# Altium PCB Pet_Tracker_MB_Test.PcbDoc
Units mm, origin at the board's own origin, x right, y up, seen from the top; angles counter-clockwise.
Board outline 106 x 60 mm, 3 copper layers (Top Layer, Mid-Layer 2, Bottom Layer); 57 components, 61 nets, 233 pads, 67 vias.
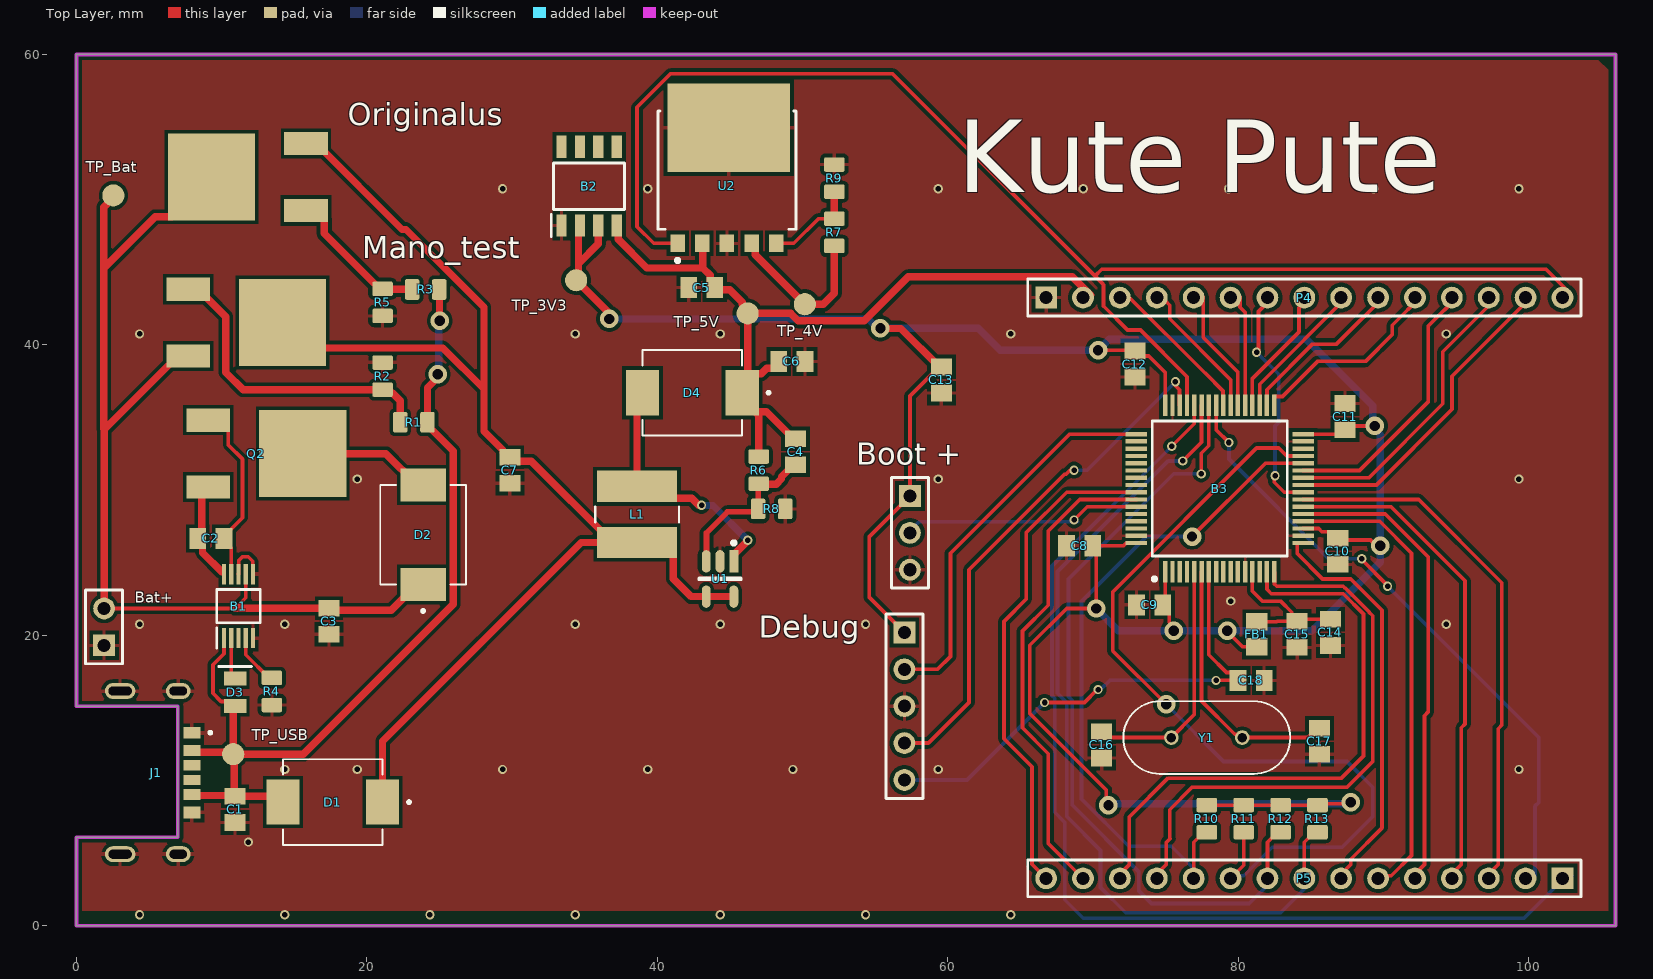
[diagram p0: Top Layer view]
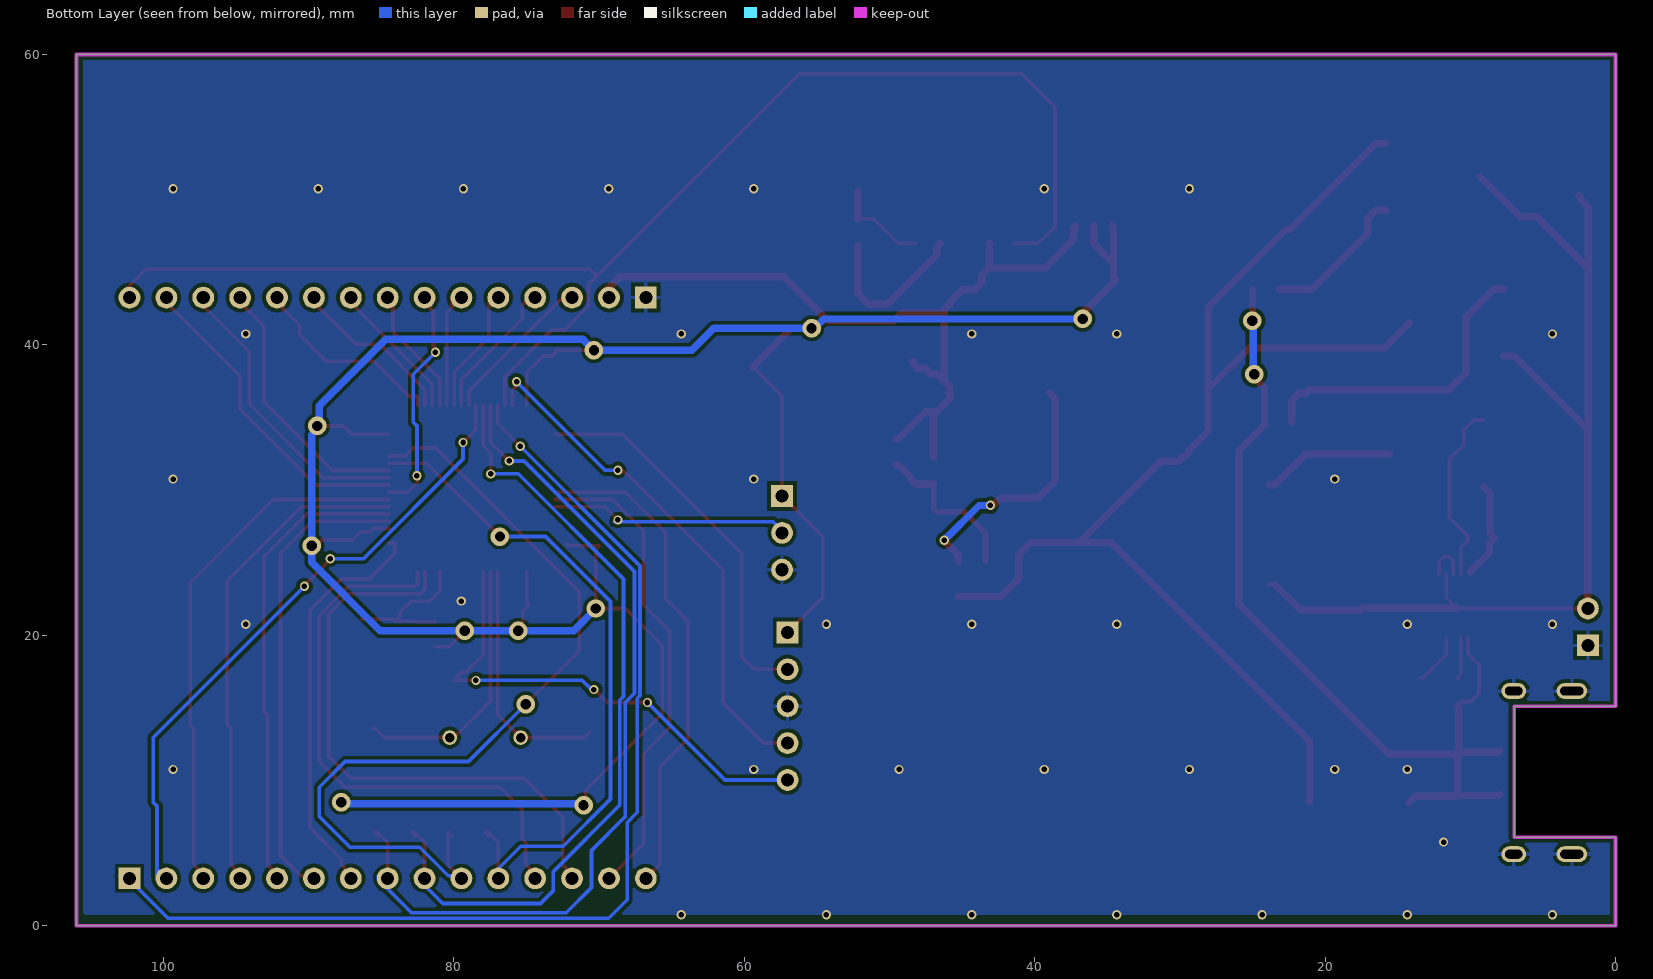
[diagram p1: Bottom Layer view, seen from below]

## Layer stack, top to bottom
Top Solder: solder mask 0.0102, Solder Resist, Dk 3.5
Top Layer: signal copper 0.0356
Dielectric 1: dielectric 0.32, FR-4, Dk 4.8
Mid-Layer 2: signal copper 0.0356
Dielectric2: dielectric 0.32, FR-4, Dk 4.8
Bottom Layer: signal copper 0.0356
Bottom Solder: solder mask 0.0102, Solder Resist, Dk 3.5

## Board outline
0,0 0,6.096 6.985,6.096 6.985,15.113 0,15.113 0,60 106,60 106,0

## Design rules (kind name [scope] priority, off if disabled: settings)
Clearance [All] p1: gap=0.254 ignorepadtopadclearanceinfootprint=FALSE except(0: Arc-Hole Track-Hole SMDPad-Hole THPad-Hole Via-Hole Fill-Hole Poly-Hole Region-Hole Text-Hole; 0.127: Arc-Arc Arc-Track Arc-SMDPad Arc-Text Track-Track Track-SMDPad Track-Text SMDPad-SMDPad SMDPad-Text THPad-Text Via-Text Fill-Text Poly-Text Region-Text Text-Text)
MinimumSolderMaskSliver [All] p1: minsoldermaskwidth=0.038
PolygonConnect VIA_COnnect [(InNamedUnion('Via Stitchings'))] p1: thpad.connectstyle=Relief thpad.reliefconductorwidth=0.254 thpad.reliefentries=4 thpad.polygonreliefangle="90 Angle" thpad.airgapwidth=0.254 smdpad.connectstyle=Relief smdpad.reliefconductorwidth=0.254 smdpad.reliefentries=4 smdpad.polygonreliefangle="90 Angle" smdpad.airgapwidth=0.254 via.connectstyle=Direct via.reliefconductorwidth=0.254 via.reliefentries=4 via.polygonreliefangle="90 Angle" via.airgapwidth=0.254
PolygonConnect PolygonConnect_1 [All] p2: connectstyle=Relief reliefconductorwidth=0.254 reliefentries=4 polygonreliefangle="90 Angle" airgapwidth=0.254
RoutingVias [All] p1: holewidth=0.711 width=1.27 viastyle="Through Hole" minholewidth=0.15 minwidth=0.25 maxholewidth=1 maxwidth=1.5
SilkToSolderMaskClearance [IsPad] p1: minsilkscreentomaskgap=0.127 clearancetoexposedcopper=TRUE
SolderMaskExpansion [All] p1: expansion=0.038 istentingtop=FALSE
Width [All] p1: maxlimit=1 minlimit=0.254 preferedwidth=0.254
28 further rules are at their usual default settings.

## Classes and differential pairs
component class STM: B3 "Boot +" C8 C9 C10 C11 C12 C13 C14 C15 C16 C17 C18 Debug FB1 P4 P5 R10 R11 R12 R13 Y1
component class Power_Schematic: B1 B2 Bat+ C1 C2 C3 C4 C5 C6 C7 D1 D2 D3 D4 L1 Mano_test Originalus Q2 R1 R2 R3 R4 R5 R6 R7 R8 R9 TP_3V3 TP_4V TP_5V TP_Bat TP_USB U1 U2
component class Blue_Pill_V2_Schematic: C19 C20 C21 C22 C23 C24 J2 L2 Q4 Q5 Q6 R14 R15 R16 R17 R18 R19 R20 U3

## Components (designator, comment, footprint, x,y, rotation, side; value= is the part's Value field where it differs from the comment)
B1 "MAX1898EUB42+" MAX1898EUB42 11.16,22.012 r90 top
B2 "MC33269D-3.3G" 3V3Voltage_MC33269D-3.3G 35.306,50.927 r90 top
B3 "STM32L433RCT6P" STM32L433RCT6P 78.74,30.099 r90 top
Bat+ "Battery 4.2V" HDR1X2 1.905,19.304 r90 top (schematic designator P1)
"Boot +" "Header 3" HDR1X3 57.404,29.591 r270 top (schematic designator P2)
C1 "10uF" CAP_0805 10.922,8.001 r90 top
C2 "100nF" CAP_0805 9.26,26.67 r180 top
C3 "SMT_CAP" CAP_0805 17.399,20.966 r90 top
C4 "4.7nF" CAP_0805 49.53,32.639 r90 top
C5 "330nF" CAP_0805 43.064,43.942 r0 top
C6 "10uF" CAP_0805 49.276,38.862 r180 top
C7 "10uF" CAP_0805 29.845,31.369 r90 top
C8 "100nF" CAP_0805 69.088,26.162 r0 top
C9 "100nF" CAP_0805 73.914,22.098 r0 top
C10 "100nF" CAP_0805 86.868,25.781 r90 top
C11 "100nF" CAP_0805 87.376,35.063 r270 top
C12 "100nF" CAP_0805 72.898,38.68 r90 top
C13 "1uF" CAP_0805 59.563,37.581 r90 top
C14 "1uF" CAP_0805 86.36,20.193 r90 top
C15 "10nF" CAP_0805 84.074,20.066 r90 top
C16 "27pF" CAP_0805 70.612,12.446 r270 top
C17 "27pF" CAP_0805 85.598,12.7 r90 top
C18 "100nF" CAP_0805 80.899,16.891 r180 top
D1 "SS32" POWER_SCHOTKY_3A 17.653,8.509 r180 top
D2 "SS32" POWER_SCHOTKY_3A 23.876,26.924 r90 top
D3 "Charge_LED" LED_0805 10.922,16.068 r270 top
D4 "SS32" POWER_SCHOTKY_3A 42.418,36.703 r180 top
Debug "Header 5" HDR1X5 57.023,20.193 r270 top (schematic designator P3)
FB1 "120R" FER_BEAD_0805 81.28,20.066 r90 top
J1 "POWER_USB_C" POWER_USB_C 3.008,10.541 r270 top
L1 "10uH" MCSD54-4R7MU 38.608,28.321 r270 top
Mano_test "MOSFET Pch -45V -4.5A" P_CHANNEL_POWER_RD3H045SPTL1 11.938,41.529 r270 top (schematic designator Q1)
Originalus "MOSFET Pch -45V -4.5A" P_CHANNEL_POWER_RD3H045SPTL1 11.557,51.562 r90 top (schematic designator Q3)
P4 "Header 15" HDR1X15 66.786,43.257 r0 top
P5 "Header 15" HDR1X15 102.346,3.257 r180 top
Q2 "MOSFET Pch -45V -4.5A" P_CHANNEL_POWER_RD3H045SPTL1 13.335,32.512 r270 top
R1 "0" RES_0805 23.241,34.671 r0 top
R2 "100k" RES_0805 21.082,37.846 r270 top
R3 "0" RES_0805 24.049,43.815 r0 top
R4 "750" RES_0805 13.462,16.129 r270 top
R5 "100k" RES_0805 21.082,42.926 r90 top
R6 "100k" RES_0805 46.99,31.369 r90 top
R7 "5.1k" RES_0805 52.197,47.752 r270 top
R8 "33k" RES_0805 47.879,28.702 r180 top
R9 "2.2k" RES_0805 52.197,51.481 r270 top
R10 "4K7" RES_0805 77.851,7.366 r90 top
R11 "4K7" RES_0805 80.391,7.366 r90 top
R12 "4K7" RES_0805 82.931,7.366 r90 top
R13 "4K7" RES_0805 85.471,7.366 r90 top
TP_3V3 "T_P_3V3" T_P 34.417,44.45 r90 top net-tie (schematic designator T_P3)
TP_4V "T_P_4V" T_P 50.165,42.799 r180 top net-tie (schematic designator T_P5)
TP_5V "T_P_5V" T_P 46.228,42.164 r180 top net-tie (schematic designator T_P4)
TP_Bat "T_P_BAT" T_P 2.54,50.292 r90 top net-tie (schematic designator T_P2)
TP_USB "T_P_USB" T_P 10.795,11.811 r90 top net-tie (schematic designator T_P1)
U1 "Switch Voltage Regulator MIC2250-1YD5-TR" Switching_MIC2250-1YD5-TR 44.323,23.876 r270 top
U2 "1.24V-5V MIC37252WR" 1V24_5V_MIC37252WR 44.802,51.775 r0 top
Y1 "16MHZ_TL" 16MHZ_TL 77.851,12.954 r180 top

## Footprints (in the part's own frame and the unit in brackets; to place one, negate y for a bottom-side part, rotate by r counter-clockwise, add the part's x,y. Pads: shape width x height; smd on the part's side, far side on the other; paste and mask are expansions set on the pad)
1V24_5V_MIC37252WR [mm]
  rect 1x1.2 smd paste-2539.97 mask+0: 1(-3.4,-4.785) 2(-1.7,-4.785) 3(0,-4.785) 4(1.7,-4.785) 5(3.4,-4.785)
  rect 8.45x6.096 smd paste-1000 mask+0: 6(0.127,3.175)
  silkscreen extent -4.76,-6.08 4.76,4.32, body extent -4.63,-5.09 4.63,4.96, height 1.78
3V3Voltage_MC33269D-3.3G [mm]
  rect 1.525x0.7 smd: 1(-2.712,1.905) 2(-2.712,0.635) 3(-2.712,-0.635) 4(-2.712,-1.905) 5(2.712,-1.905) 6(2.712,-0.635) 7(2.712,0.635) 8(2.712,1.905)
  silkscreen extent -3.47,-2.45 1.6,2.61, body extent -3,-2.45 3,2.45, height 1.75
16MHZ_TL [mm]
  round 1.007 hole 0.657: 1(-2.44,0) 2(2.44,0)
  silkscreen extent -5.75,-2.5 5.75,2.5, body extent -5.75,-2.5 5.75,2.5, height 3.25
CAP_0805 [mm]
  rect 1.15x1.45 smd: 1(-0.9,0) 2(0.9,0)
FER_BEAD_0805 [mm]
  rect 1.2x1.47 smd: 1(-0.86,0) 2(0.86,0)
  body extent -1,-0.63 1,0.63, height 1.05
HDR1X2 [mm] "Connector; Header; 2 Position"
  rect 1.5x1.5 hole 0.9: 1(0,0)
  round 1.5 hole 0.9: 2(2.54,0)
  silkscreen extent -1.27,-1.27 3.81,1.27
HDR1X3 [mm] "Connector; Header; 3 Position"
  rect 1.5x1.5 hole 0.9: 1(0,0)
  round 1.5 hole 0.9: 2(2.54,0) 3(5.08,0)
  silkscreen extent -1.27,-1.27 6.35,1.27
HDR1X5 [mm] "Connector; Header; 5 Position"
  rect 1.5x1.5 hole 0.9: 1(0,0)
  round 1.5 hole 0.9: 2(2.54,0) 3(5.08,0) 4(7.62,0) 5(10.16,0)
  silkscreen extent -1.27,-1.27 11.43,1.27
HDR1X15 [mm] "Connector; Header; 15 Position"
  rect 1.5x1.5 hole 0.9: 1(0,0)
  round 1.5 hole 0.9: 2(2.54,0) 3(5.08,0) 4(7.62,0) 5(10.16,0) 6(12.7,0) 7(15.24,0) 8(17.78,0) 9(20.32,0) 10(22.86,0) 11(25.4,0) 12(27.94,0) 13(30.48,0) 14(33.02,0) 15(35.56,0)
  silkscreen extent -1.27,-1.27 36.83,1.27
LED_0805 [mm]
  rect 0.95x1.55 smd: 1(-0.95,0) 2(0.95,0)
  silkscreen extent -1.78,-1.12 -1.78,1.12, body extent -1.02,-0.63 0.98,0.63, height 0.7
MAX1898EUB42 [mm]
  rect 1.4x0.3 smd: 1(-2.2,1) 2(-2.2,0.5) 3(-2.2,0) 4(-2.2,-0.5) 5(-2.2,-1) 6(2.2,-1) 7(2.2,-0.5) 8(2.2,0) 9(2.2,0.5) 10(2.2,1)
  silkscreen extent -2.9,-1.5 1.15,1.5, body extent -2.45,-1.5 2.45,1.5, height 1.1
MCSD54-4R7MU [mil]
  rect 85x217 smd paste+0 mask+0: 1(-76,0) 2(76,0)
  silkscreen extent -21,-114 21,114, body extent -94,-94 84,84, height 126
P_CHANNEL_POWER_RD3H045SPTL1 [mm]
  rect 1.6x3 smd: 1(-2.3,-4.25) 3(2.3,-4.25)
  rect 6x6 smd: 2(0,2.25)
  body extent -3.18,-5.39 3.43,5.61, height 2.31
POWER_SCHOTKY_3A [mm]
  rect 2.29x3.12 smd: A(3.43,0) C(-3.43,0)
  silkscreen extent -5.35,-2.95 3.43,2.95, body extent -4.1,-2.95 3.85,2.95, height 1.2
POWER_USB_C [mm]
  rect 0.7x1.2 smd: A5(-0.5,4.95) B5(0.5,4.95)
  rect 0.76x1.2 smd: A9(1.52,4.95) B9(-1.52,4.95)
  rect 0.8x1.2 smd: A12(2.75,4.95) B12(-2.75,4.95)
  oval 1.1x2.1 hole 0.6 slot 1.6 at 90 deg: S1(-5.62,0) S2(5.62,0)
  oval 1.1x1.7 hole 0.6 slot 1.2 at 90 deg: S3(-5.62,4) S4(5.62,4)
  silkscreen extent -2.85,6.11 -2.65,6.31, body extent -5.77,-2.4 5.77,5.1, height 1.56
RES_0805 [mm]
  rrect25% 1x1.42 smd: 1(-0.935,0) 2(0.935,0)
STM32L433RCT6P [mm]
  rect 1.475x0.3 smd: 1(-5.738,3.75) 2(-5.738,3.25) 3(-5.738,2.75) 4(-5.738,2.25) 5(-5.738,1.75) 6(-5.738,1.25) 7(-5.738,0.75) 8(-5.738,0.25) 9(-5.738,-0.25) 10(-5.738,-0.75) 11(-5.738,-1.25) 12(-5.738,-1.75) 13(-5.738,-2.25) 14(-5.738,-2.75) 15(-5.738,-3.25) 16(-5.738,-3.75) 33(5.738,-3.75) 34(5.738,-3.25) 35(5.738,-2.75) 36(5.738,-2.25) 37(5.738,-1.75) 38(5.738,-1.25) 39(5.738,-0.75) 40(5.738,-0.25) 41(5.738,0.25) 42(5.738,0.75) 43(5.738,1.25) 44(5.738,1.75) 45(5.738,2.25) 46(5.738,2.75) 47(5.738,3.25) 48(5.738,3.75)
  rect 0.3x1.475 smd: 17(-3.75,-5.738) 18(-3.25,-5.738) 19(-2.75,-5.738) 20(-2.25,-5.738) 21(-1.75,-5.738) 22(-1.25,-5.738) 23(-0.75,-5.738) 24(-0.25,-5.738) 25(0.25,-5.738) 26(0.75,-5.738) 27(1.25,-5.738) 28(1.75,-5.738) 29(2.25,-5.738) 30(2.75,-5.738) 31(3.25,-5.738) 32(3.75,-5.738) 49(3.75,5.738) 50(3.25,5.738) 51(2.75,5.738) 52(2.25,5.738) 53(1.75,5.738) 54(1.25,5.738) 55(0.75,5.738) 56(0.25,5.738) 57(-0.25,5.738) 58(-0.75,5.738) 59(-1.25,5.738) 60(-1.75,5.738) 61(-2.25,5.738) 62(-2.75,5.738) 63(-3.25,5.738) 64(-3.75,5.738)
  silkscreen extent -6.35,-4.65 4.65,4.65, body extent -6,-6 6,6, height 1.6
Switching_MIC2250-1YD5-TR [mm]
  rect 1.54x0.612 smd paste+0 mask+0: 1(-1.216,0.95)
  rrect100% 1.54x0.612 smd paste+0 mask+0: 2(-1.216,0) 3(-1.216,-0.95) 4(1.216,-0.95) 5(1.216,0.95)
  silkscreen extent -2.61,-1.45 0.05,1.45, body extent -1.4,-1.45 1.4,1.45, height 1
T_P [mil]
  round 60 smd: 1(0,0)

## Part data
B1: "Part: MAX1898EUB42+ BATT CHARGER, LI-ION, 4.2V", Manufacturer_Name="Analog Devices", Mouser Part Number=700-MAX1898EUB42, Arrow Part Number=MAX1898EUB42+, Arrow Price/Stock=https://www.arrow.com/en/products/max1898eub42/maxim-integrated?region=nac, Datasheet Link=https://datasheets.maximintegrated.com/en/ds/MAX1898.pdf, Geometry.Height=1.1mm, Manufacturer_Part_Number=MAX1898EUB42+, Mouser Price/Stock=https://www.mouser.co.uk/ProductDetail/Maxim-Integrated/MAX1898EUB42%2b?qs=LHmEVA8xxfaFlPLqK8C6rw%3D%3D
B2: library part LDO3V3, "Voltage regulator,Part: MC33269D-3.3G, Low Dropout Voltage Regulator, 0.8A 3.3", Manufacturer_Name=onsemi, Mouser Part Number=863-MC33269D-3.3G, Arrow Part Number=MC33269D-3.3G, Arrow Price/Stock=https://www.arrow.com/en/products/mc33269d-3.3g/on-semiconductor?region=europe, Datasheet Link=http://www.onsemi.com/pub/Collateral/MC33269-D.PDF, Geometry.Height=1.75mm, Manufacturer_Part_Number=MC33269D-3.3G, Mouser Price/Stock=https://www.mouser.co.uk/ProductDetail/onsemi/MC33269D-33G?qs=dFKnUM%2FquJZ%252BBcrN2hd5Yg%3D%3D
B3: "ARM Cortex-M4 MCU 80 MHz with 256 Kbyte", Manufacturer_Name=STMicroelectronics, Mouser Part Number=511-STM32L433RCT6P, Arrow Part Number=STM32L433RCT6P, Arrow Price/Stock=https://www.arrow.com/en/products/stm32l433rct6p/stmicroelectronics?region=nac, Datasheet Link=https://www.mouser.com/datasheet/2/389/stm32l433cc-956250.pdf, Geometry.Height=1.6mm, Manufacturer_Part_Number=STM32L433RCT6P, Mouser Price/Stock=https://www.mouser.co.uk/ProductDetail/STMicroelectronics/STM32L433RCT6P?qs=5aG0NVq1C4w37CrDvhaloQ%3D%3D
Bat+: library part "Header 2", "Header, 2-Pin", LatestRevisionDate=17-Jul-2002, LatestRevisionNote="Re-released for DXP Platform.", Publisher="Altium Limited"
"Boot +": "Header, 3-Pin", LatestRevisionDate=17-Jul-2002, LatestRevisionNote="Re-released for DXP Platform.", Publisher="Altium Limited"
C1 C2 C4 C5 C6 C7 C8 C9 C10 C11 C12 C13 C14 C15 C16 C17 C18: library part SMT_CAP, Package=None, Availability=Unavailable, MP=LD051A270KAB2A, Price=None
C3: Package=None, Availability=Unavailable, MP=LD051A270KAB2A, Price=None
D1 D2 D4: library part POWER_SCHOTKY_3A, "Part: SS32", Package="SMC-2 ON Semiconductor", Availability="In Stock", Check_prices=https://www.snapeda.com/parts/SS32/Onsemi/view-part/?ref=eda, MF="ON Semiconductor", MP=SS32, Price=None, Purchase-URL=https://pricing.snapeda.com/search/part/SS32/?ref=eda, SnapEDA_Link=https://www.snapeda.com/parts/SS32/Onsemi/view-part/?ref=snap
D3: library part LED, "Part: HSMH-C170", Manufacturer_Name="Avago Technologies", Manufacturer_Part_Number=HSMH-C170, Mouser Part Number=630-HSMH-C170, Datasheet Link=https://docs.broadcom.com/docs/AV02-0551EN, Geometry.Height=0.9mm, Mouser Price/Stock=https://www.mouser.co.uk/ProductDetail/Broadcom-Avago/HSMH-C170?qs=YDL0qNrpDT6b21G9HrN9ig%3D%3D
Debug: "Header, 5-Pin", LatestRevisionDate=17-Jul-2002, LatestRevisionNote="Re-released for DXP Platform.", Publisher="Altium Limited"
FB1: library part SMT_FER_BEAD, "1 kOhms @ 100MHz 1 1.5A 150mOhm", Package="0805 TDK", Availability=Good, Check_prices=https://www.snapeda.com/parts/MPZ2012S102ATD25/TDK/view-part/2724083/?ref=eda, MF=TDK, MP=MPZ2012S102ATD25, Price=None, Purchase-URL=https://pricing.snapeda.com/search/part/MPZ2012S102ATD25/?ref=eda, SnapEDA_Link=https://www.snapeda.com/parts/MPZ2012S102ATD25/TDK/view-part/2724083/?ref=snap
J1: "Type C USB Charging Connector part name : USB4515-GF-A_REVA", Package=None, Check_prices=https://www.snapeda.com/parts/USB4515-GF-A/Global+Connector+Technology/view-part/?ref=eda, Digi-Key_Part_Number=2073-USB4515-GF-ATR-ND, MF="Global Connector Technology", MP=USB4515-GF-A, SnapEDA_Link=https://www.snapeda.com/parts/USB4515-GF-A/Global+Connector+Technology/view-part/?ref=snap
L1: library part IND, "Part: MCSD54-4R7MU", Manufacturer_Part_Number=MCSD54-4R7MU, Mfr_Name=Multicomp, Copyright="Copyright (C) 2023 Ultra Librarian. All rights reserved."
Mano_test Originalus Q2: library part "P_CHANNEL_POWER 4.5A RD3H045SPTL1", "Part: RD3H045SPTL1", Manufacturer_Name="ROHM Semiconductor", Manufacturer_Part_Number=RD3H045SPTL1, Package=RD3P175SNFRATL, DeviceSetName=RD3H045SPTL1, GateName_1=G$1, Height=mm, LibraryName=RD3H045SPTL1, Mouser_Part_Number=755-RD3H045SPTL1, Mouser_Price-Stock=https://www.mouser.co.uk/ProductDetail/ROHM-Semiconductor/RD3H045SPTL1?qs=W0yvOO0ixfGBWnxPdnIMog%3D%3D, SymbolName_1=RD3H045SPTL1
P4 P5: "Header, 15-Pin", LatestRevisionDate=17-Jul-2002, LatestRevisionNote="Re-released for DXP Platform.", Publisher="Altium Limited"
R1 R2 R3 R4 R5 R6 R7 R8 R9 R10 R11 R12 R13: library part SMT_RES, Package=0805, Power_Rating=".25 W", Resistance=.33, Tolerance=1%, Availability="In Stock", Check_prices=https://www.snapeda.com/parts/2-2176053-0/TE+Connectivity/view-part/?ref=eda, EU_RoHS_Compliance="Compliant with Exemptions", MF="TE Connectivity", MP=2-2176053-0, Price=None, SnapEDA_Link=https://www.snapeda.com/parts/2-2176053-0/TE+Connectivity/view-part/?ref=snap
TP_3V3 TP_4V TP_5V TP_Bat TP_USB: library part T_P, "Test_point"
U1: "Part: MIC2250-1YD5-TR / 2.5V to 5.5 V input  / 1.24V to 32V output"
U2: "Part: MIC37252WR"
Y1: "16MHz Â±30ppm Crystal 18pF 40 Ohms HC-49/US", Package="HC-49/US ABRACON", Availability="In Stock", Check_prices=https://www.snapeda.com/parts/ABL-16.000MHz-B4Y/Abracon+LLC/view-part/?ref=eda, MF="Abracon LLC", MP=ABL-16.000MHz-B4Y, Price=None, Purchase-URL=https://pricing.snapeda.com/search/part/ABL-16.000MHz-B4Y/?ref=eda, SnapEDA_Link=https://www.snapeda.com/parts/ABL-16.000MHz-B4Y/Abracon+LLC/view-part/?ref=snap

## Via types
v1: diameter 0.635, hole 0.381, Top Layer to Bottom Layer, tented both sides, 51 vias
v2: diameter 1.27, hole 0.711, Top Layer to Bottom Layer, tented both sides, 14 vias
v3: diameter 0.635, hole 0.381, Top Layer to Bottom Layer, 2 vias

## Nets (pads, with @x,y where several pads share a name; then routed paths per layer and width w, separated by ;. In a path a pad name is that pad's centre, name@x,y a point inside that pad or via, vN(x,y) a via of type N, cw(c..) or ccw(c..) an arc to the next point about the centre after c; other vN are vias at no path point)
3V3: "Boot +.1" B2.2 B2.3 B3.1 B3.19 B3.32 B3.48 B3.64 C8.2 C9.2 C10.2 C11.2 C12.2 C13.2 Debug.1 FB1.1 R10.2 R11.2 R12.2 R13.2 TP_3V3.1 | length 201.9
  Top Layer w0.254: Debug.1 54.61,22.606 54.61,26.797 57.404,29.591 57.404,36.472 59.413,38.481 C13.2 ; v2(70.358,39.624) C12.2@73.004,39.624 ; v2(71.074,8.301) 70.927,8.448 70.927,9.337 65.659,14.605 65.659,19.304 68.199,21.844 v2(70.231,21.844) 70.231,25.919 C8.2 72.107,26.162 72.263,26.318 ; C12.2 73.243,39.235 73.855,39.235 74.99,38.1 B3.48 ; B3.1 74.99,22.274 C9.2 75.262,21.65 75.262,20.898 ; R10.2 R11.2 R12.2 R13.2 85.575,8.405 87.653,8.405 v2(87.757,8.509) ; v2(79.248,20.32) 79.248,20.271 80.313,19.206 FB1.1 ; B3.19 85.554,27.349 85.774,27.129 86.42,27.129 C10.2 86.995,26.554 89.122,26.554 89.514,26.162 v2(89.789,26.162) ; B3.32 87.062,33.849 C11.2 87.63,34.417 v2(89.408,34.417)
  Top Layer w0.508: B2.2 34.575,48.119 34.575,45.593 ; B2.3 35.941,46.959 34.575,45.593 ; v2@36.557,42.31 TP_3V3.1 34.575,44.608 34.575,45.593 ; v2(55.372,41.148) 55.395,41.125 56.769,41.125 C13.2@59.413,38.481
  Bottom Layer w0.508: v2(36.703,41.783) 54.531,41.783 55.166,41.148 v2(55.372,41.148) 62.103,41.148 63.627,39.624 v2(70.358,39.624) 71.12,40.386 84.709,40.386 89.281,35.814 89.281,34.544 v2(89.408,34.417) ; v2(70.231,21.844) 71.755,20.32 v2(79.248,20.32) 85.078,20.32 ; v2(71.074,8.301) 71.178,8.405 87.653,8.405 v2(87.757,8.509) ; 85.09,20.32 89.789,25.019 89.789,33.83
  other v2: 75.565,20.32
3V3A: B3.13 C14.2 C15.2 FB1.2 | length 10.6
  Top Layer w0.254: B3.13 80.99,23.023 81.661,22.352 82.931,22.352 83.693,21.59 83.693,21.347 C15.2 ; FB1.2 82.662,20.926 82.702,20.966 C15.2 ; C14.2 84.201,21.093 C15.2
4V: R7.2 TP_4V.1 U2.4 | length 11.3
  Top Layer w0.508: U2.4 46.748,46.744 46.748,46.216 TP_4V.1 51.435,42.799 52.197,43.561 R7.2
5V: B2.4 C4.2 C5.2 C6.2 D4.C P4.2 R6.2 TP_5V.1 U2.2 | length 56.7
  Top Layer w0.508: B2.4 37.307,48.119 37.307,47.275 39.287,45.295 43.131,45.295 ; U2.2 43.131,46.961 43.131,45.295 ; R6.2 46.99,35.146 D4.C@46.739,35.397 ; C6.2 48.376,38.712 48.055,38.391 47.536,38.391 47.154,38.009 46.739,38.009 D4.C@46.228,37.498 ; C4.2 49.38,33.539 47.522,35.397 46.99,35.397 D4.C@46.739,35.397 ; P4.2@69.85,43.434 68.592,44.692 57.3,44.692 54.264,41.656 49.692,41.656 49.184,42.164 TP_5V.1 ; 43.131,45.295 43.643,44.783 43.643,44.263 44.117,43.789 45.003,43.789 45.858,42.934 45.858,42.808 46.228,42.439 TP_5V.1 ; D4.C@46.228,37.498 TP_5V.1 ; D4.C@46.228,37.498 45.848,37.118 D4.C 45.848,36.288 D4.C@46.739,35.397
5V_UNREGULATED: C7.2 D1.C L1.2 Mano_test.2 Originalus.3 U1.4 U1.5 | length 89.9
  Top Layer w0.5: Mano_test.2 15.928,39.789 25.235,39.789 28.067,36.957 ; Originalus.3 16.507,53.862 22.417,47.952 22.703,47.952 28.067,42.587 28.067,36.957 ; D1.C 21.083,12.701 34.773,26.391 L1.2@36.932,26.391 ; U1.5 U1.4 42.338,22.66 41.11,23.889 41.11,25.565 40.284,26.391 L1.2 L1.2@36.932,26.391 ; 28.067,36.957 28.067,34.047 29.374,32.74 29.374,32.59 29.695,32.269 C7.2 30.124,31.99 31.332,31.99 L1.2@36.932,26.391
5V_USB_CHRG: B1.1 C1.2 D1.A D3.2 J1.A9 J1.B9 R1.2 R3.2 TP_USB.1 | length 63.9
  Top Layer w0.254: B1.1 10.16,18.731 9.398,17.969 9.398,16.002 9.962,15.438 10.602,15.438 D3.2 ; C1.2@10.846,8.977 C1.2@10.858,8.965
  Top Layer w0.508: J1.A9 8.018,8.961 10.83,8.961 C1.2@10.846,8.977 ; J1.B9 8.083,11.936 10.67,11.936 TP_USB.1 ; D3.2 10.795,14.991 TP_USB.1 ; D1.A 13.831,8.901 C1.2 10.858,8.965 10.858,11.747 TP_USB.1 ; v2(24.892,37.973) 24.892,37.767 24.176,37.051 R1.2 24.176,34.461 25.944,32.693 25.944,22.139 15.616,11.811 TP_USB.1 ; R3.2 25.001,43.797 25.001,41.674 v2(25.019,41.656)
  Bottom Layer w0.508: v2(24.892,37.973) 24.956,38.036 24.956,41.593 v2(25.019,41.656)
GND: "Boot +.3" B1.5 B1.6 B1.8 B2.1 B3.12 B3.18 B3.31 B3.47 B3.63 Bat+.1 C1.1 C3.1 C5.1 C6.1 C7.1 C8.1 C9.1 C10.1 C11.1 C12.1 C13.1 C14.1 C15.1 C16.2 C17.1 C18.1 Debug.3 J1.A12 J1.B12 J1.S1 J1.S2 J1.S3 J1.S4 P4.1 R2.1 R4.2 R5.1 R8.1 R9.1 U1.2 U2.3 U2.6 | length 3
  Top Layer w0.254: B1.8 11.183,24.235 11.183,25.153 11.43,25.4 11.83,25.4 12.137,25.093 12.137,24.235 B1.6
  other v1: 4.346,0.757 14.346,0.757 24.346,0.757 34.346,0.757 44.346,0.757 54.346,0.757 64.346,0.757 11.846,5.757 14.346,10.757 19.346,10.757 29.346,10.757 39.346,10.757 49.346,10.757 59.346,10.757 99.346,10.757 4.346,20.757 14.346,20.757 34.346,20.757 44.346,20.757 54.346,20.757 94.346,20.757 79.502,22.352 19.346,30.757 59.346,30.757 99.346,30.757 4.346,40.757 34.346,40.757 44.346,40.757 64.346,40.757 94.346,40.757 29.346,50.757 39.346,50.757 59.346,50.757 69.346,50.757 79.346,50.757 89.346,50.757 99.346,50.757
I2C1SCL: B3.28 P5.11 R10.1 | length 47.5
  Top Layer w0.254: v2(76.835,26.797) 81.887,31.849 B3.28 ; P5.11 76.946,5.736 77.641,6.431 R10.1 R10.1@77.597,6.177
  Bottom Layer w0.254: v2(76.835,26.797) 73.691,26.797 69.215,22.321 69.215,8.723 72.477,5.461 75.393,5.461 P5.11@77.597,3.257
I2C1SDA: B3.29 P5.10 R11.1 | length 60.1
  Top Layer w0.254: v2(75.057,15.24) 71.374,18.923 71.374,22.987 81.28,32.893 82.804,32.893 83.348,32.349 B3.29 ; P5.10 80.391,4.162 R11.1 R11.1@80.137,6.177
  Bottom Layer w0.254: v2(75.057,15.24) 78.994,11.303 87.503,11.303 89.281,9.525 89.281,7.515 87.167,5.401 82.363,5.401 80.391,3.429 P5.10@80.137,3.429
I2C2SCL: B3.42 P5.9 R12.1 | length 55.3
  Top Layer w0.254: v1(77.47,31.115) 77.47,32.533 77.99,33.053 B3.42 ; P5.9 82.026,5.736 82.721,6.431 R12.1 R12.1@82.677,6.177
  Bottom Layer w0.254: v1(77.47,31.115) 75.565,31.115 68.326,23.876 68.326,15.781 68.58,15.527 68.58,8.307 73.152,3.735 73.152,2.413 74.041,1.524 80.772,1.524 82.265,3.017 P5.9@82.677,3.429
I2C2SDA: B3.43 P5.8 R13.1 | length 59.8
  Top Layer w0.254: v1(76.2,32.004) 77.49,33.294 B3.43 ; P5.8 84.566,5.736 85.261,6.431 R13.1 R13.1@85.217,6.177
  Bottom Layer w0.254: v1(76.2,32.004) 75.184,32.004 67.564,24.384 67.564,16.005 68.199,15.37 68.199,7.515 70.531,5.183 70.531,2.621 72.263,0.889 82.931,0.889 85.217,3.175 P5.8@85.217,3.429
NetB1_2: B1.2 D3.1 | length 2.9
  Top Layer w0.254: B1.2 10.66,17.28 D3.1
NetB1_4: B1.4 R4.1 | length 3.6
  Top Layer w0.254: B1.4 11.66,18.656 13.252,17.064 R4.1
NetB1_9: B1.9 C2.1 Q2.1 | length 12.7
  Top Layer w0.254: Q2.1 9.785,34.812 10.458,34.139 10.458,33.103 11.43,32.131 11.43,28.09 10.16,26.82 C2.1 10.16,26.52 10.66,26.02 B1.9
NetB1_10: B1.10 C2.2 Q2.3 | length 6.8
  Top Layer w0.508: Q2.3 8.637,29.763 8.637,26.947 C2.2 8.681,26.349 8.681,25.691 B1.10@10.011,24.362
NetB3_5: B3.5 C16.1 Y1.2 | length 17
  Top Layer w0.254: C16.1 71.004,12.954 Y1.2 76.99,14.533 B3.5
NetB3_6: B3.6 C17.2 Y1.1 | length 18.3
  Top Layer w0.254: B3.6 77.49,15.474 79.779,13.185 79.856,13.185 80.087,12.954 Y1.1 84.802,12.954 85.448,13.6 C17.2
NetB3_59: "Boot +.2" B3.59 | length 16.7
  Top Layer w0.254: v1@68.654,27.887 69.616,28.849 B3.59
  Bottom Layer w0.254: 57.404,27.051 57.404,27.186 58.031,27.813 v1@68.961,27.813
  other v1: 68.707,27.94
NetB4_2: 
NetB4_4: 
NetB4_9: 
NetB4_10: 
NetC4_1: C4.1 R6.1 R8.2 U1.3 | length 11.1
  Top Layer w0.381: U1.3 43.393,25.111 43.393,27.054 44.831,28.492 46.734,28.492 46.967,28.725 R6.1@46.967,30.411
  Top Layer w0.508: R6.1@46.967,30.411 48.202,30.411 48.561,30.77 48.561,30.92 49.38,31.739 C4.1
NetC22_1: 
NetD2_A: D2.A Q2.2 | length 9.2
  Top Layer w0.508: Q2.2 21.303,32.512 23.461,30.354 D2.A
NetD4_A: D4.A L1.1 U1.1 | length 17.4
  Top Layer w0.508: D4.A 38.608,36.323 38.608,30.607 39.789,29.426 42.377,29.426 42.847,28.956 v3(43.053,28.956) ; U1.1 45.273,25.555 46.228,26.51 v3(46.228,26.543)
  Bottom Layer w0.508: v3(43.053,28.956) 43.077,28.932 43.839,28.932 v3(46.228,26.543)
NetD6_A: 
NetD8_A: 
NetQ1_1: Mano_test.1 R1.1 R2.2 | length 21.5
  Top Layer w0.508: Mano_test.1 8.388,43.829 10.287,41.93 10.287,38.1 11.476,36.911 R2.2 21.328,36.665 21.784,36.665 22.306,36.143 R1.1
NetQ3_1: Originalus.1 R3.1 R5.2 | length 10.2
  Top Layer w0.508: Originalus.1 16.507,49.262 17.053,48.716 17.053,47.68 20.872,43.861 R5.2 21.105,43.838 23.091,43.838 R3.1
NetQ5_1: 
NetQ6_1: 
NetR7_1: R7.1 R9.2 U2.5 | length 6.6
  Top Layer w0.254: U2.5 49.403,46.99 51.1,48.687 R7.1
  Top Layer w0.508: R7.1 R9.2
NRESET: B3.7 C18.2 Debug.5 | length 34.2
  Top Layer w0.254: v1(66.675,15.367) 69.421,15.367 70.31,16.256 v1(70.358,16.256) ; B3.7 77.99,18.657 79.212,17.435 79.551,17.435 79.756,17.23 C18.2@79.756,16.891 ; v1(78.486,16.891) C18.2@79.756,16.891 ; C18.2 C18.2@79.756,16.891
  Bottom Layer w0.254: Debug.5 61.341,10.033 v1(66.675,15.367) ; v1(70.358,16.256) 70.525,16.256 71.16,16.891 v1(78.486,16.891)
PA3: B3.17 P5.7 | length 28.2
  Top Layer w0.254: B3.17 84.097,26.349 84.074,26.326 84.074,25.623 85.821,23.876 87.757,23.876 89.916,21.717 89.916,6.731 87.757,4.572 87.757,4.205 87.106,3.554 P5.7
PA4: B3.20 P5.6 | length 31.4
  Top Layer w0.254: B3.20 89.753,27.849 91.948,25.654 91.948,4.826 90.551,3.429 P5.6@90.297,3.429
PA5: B3.21 P5.5 | length 32.4
  Top Layer w0.254: B3.21 90.142,28.349 93.091,25.4 93.091,14.71 92.837,14.456 92.837,4.205 92.186,3.554 P5.5
PA6: B3.22 P5.4 | length 34.1
  Top Layer w0.254: B3.22 90.531,28.849 95.631,23.749 95.631,13.885 95.377,13.631 95.377,4.205 94.726,3.554 P5.4
PA7: B3.23 P5.3 | length 36.8
  Top Layer w0.254: B3.23 92.444,29.349 98.171,23.622 98.171,13.821 97.917,13.567 97.917,4.205 97.266,3.554 P5.3
PA8: B3.41 P5.2 | length 43.1
  Top Layer w0.254: B3.41 78.49,34.159 v1(79.375,33.274) ; v1(88.519,25.273) 88.519,25.209 90.297,23.431 v1(90.297,23.368)
  Bottom Layer w0.254: v1(79.375,33.274) 79.375,32.131 86.233,25.273 v1(88.519,25.273) ; v1(90.297,23.368) 100.711,12.954 100.711,8.487 100.457,8.233 P5.2@100.457,3.429
PA11: B3.44 P5.1 | length 75.2
  Top Layer w0.254: v1(75.438,33.02) 76.99,34.572 B3.44
  Bottom Layer w0.254: v1(75.438,33.02) 67.183,24.765 67.183,15.847 67.373,15.656 67.373,7.801 68.072,7.103 68.072,1.778 69.342,0.508 99.695,0.508 102.015,2.828 102.396,2.828 P5.1@102.997,3.429
PA12: B3.45 P4.15 U2.1 | length 95.7
  Top Layer w0.254: U2.1 39.751,46.99 38.608,48.133 38.608,56.366 40.916,58.674 56.209,58.674 70.142,44.742 ; B3.45 76.49,37.81 73.279,41.021 72.39,41.021 70.813,42.598 70.739,42.672 70.739,43.162 cw(c71.866,43.257) 70.739,43.352 70.739,44.144 70.665,44.219 70.142,44.742 ; P4.15@102.87,43.257 102.87,43.561 101.219,45.212 70.612,45.212 70.142,44.742
PB0: B3.25 P4.14 | length 22.6
  Top Layer w0.254: B3.25 89.531,30.349 94.742,35.56 94.742,37.846 P4.14@100.33,43.434
PB1: B3.26 P4.13 | length 20.8
  Top Layer w0.254: B3.26 89.015,30.849 94.107,35.941 94.107,39.53 97.79,43.213 P4.13@97.79,43.434
PB2: B3.27 P4.12 | length 18.8
  Top Layer w0.254: B3.27 88.372,31.349 93.091,36.068 93.091,41.275 P4.12@95.25,43.434
PB12: B3.33 P4.11 | length 14.1
  Top Layer w0.254: B3.33 82.49,36.425 82.513,36.448 83.057,36.448 85.471,38.862 88.773,38.862 90.622,40.711 90.622,41.346 P4.11@92.71,43.434
PB13: B3.34 P4.10 | length 12
  Top Layer w0.254: B3.34 81.99,36.905 85.135,40.05 86.786,40.05 P4.10@90.17,43.434
PB14: B3.35 P4.9 | length 10.1
  Top Layer w0.254: B3.35 81.49,37.294 P4.9@87.63,43.434
PB15: B3.36 P4.8 | length 9.3
  Top Layer w0.254: B3.36 80.99,37.683 84.201,40.894 84.201,42.545 P4.8@85.09,43.434
PC4: B3.24 P4.7 | length 16.4
  Top Layer w0.254: v1@81.407,39.497 81.407,42.291 P4.7@82.55,43.434 ; v1(82.55,30.988) 82.487,30.925 82.487,30.543 83.181,29.849 B3.24
  Bottom Layer w0.254: v1(81.28,39.497) 82.804,37.973 82.804,34.659 82.55,34.405 v1(82.55,30.988)
PC6: B3.37 P4.6 | length 7.8
  Top Layer w0.254: P4.6@80.01,43.434 80.137,43.307 80.137,42.589 80.49,42.236 B3.37
PC7: B3.38 P4.5 | length 8.6
  Top Layer w0.254: P4.5@77.47,43.434 77.597,43.307 77.597,40.513 79.99,38.12 B3.38
PC8: B3.39 P4.4 | length 9.5
  Top Layer w0.254: P4.4@74.93,43.434 74.93,43.097 75.295,42.731 75.295,41.799 79.49,37.604 B3.39
PC9: B3.40 P4.3 | length 10.3
  Top Layer w0.254: P4.3@72.39,43.39 77.744,38.036 77.759,38.036 78.967,36.829 78.967,35.86 B3.40
SWCLK: B3.49 Debug.2 | length 26.9
  Top Layer w0.254: Debug.2 59.309,17.653 60.198,18.542 60.198,25.654 68.393,33.849 B3.49
SWDIO: B3.46 Debug.4 | length 36.1
  Top Layer w0.254: Debug.4 58.674,12.573 61.468,15.367 61.468,24.511 68.052,31.095 68.158,31.095 68.432,31.369 v1(68.707,31.369) ; v1(75.692,37.465) 75.692,37.19 75.967,36.915 75.967,35.86 B3.46
  Bottom Layer w0.254: v1(68.707,31.369) 69.596,31.369 v1(75.692,37.465)
UART1RX: B3.58 P5.14 | length 33.7
  Top Layer w0.254: P5.14@69.554,3.029 66.929,5.654 66.929,11.843 65.151,13.621 65.151,20.288 66.929,22.066 66.929,27.178 69.1,29.349 B3.58
UART1TX: B3.57 P5.15 | length 34.7
  Top Layer w0.254: P5.15@67.016,3.027 65.808,4.235 65.808,10.943 63.881,12.87 63.881,20.955 65.405,22.479 65.405,27.051 68.203,29.849 B3.57
UART2RX: B3.16 P5.12 | length 39.1
  Top Layer w0.254: P5.12 74.406,3.554 75.057,4.205 75.057,5.727 75.311,5.981 75.289,6.003 75.289,7.979 76.835,9.525 87.503,9.525 89.281,11.303 89.281,21.336 89.027,21.59 89.027,21.621 87.407,23.241 87.376,23.241 87.249,23.368 82.662,23.368 82.513,23.517 82.513,24.338 B3.16
UART2TX: B3.15 P5.13 | length 40.7
  Top Layer w0.254: P5.13 71.866,3.554 72.517,4.205 72.517,7.493 75.184,10.16 87.122,10.16 88.646,11.684 88.646,21.463 87.249,22.86 82.296,22.86 81.99,23.166 B3.15
V_Bat: B1.7 Bat+.2 C3.2 D2.C Mano_test.3 Originalus.2 TP_Bat.1 | length 72.1
  Top Layer w0.254: Bat+.2 10.922,21.844 10.944,21.866 11.66,22.582 B1.7 ; C3.2 C3.2@17.548,21.717 ; D2.C@23.461,23.494 D2.C
  Top Layer w0.508: Bat+.2 1.905,34.163 1.867,34.201 ; TP_Bat.1 2.413,50.165 2.413,50.032 1.867,49.486 1.867,45.265 ; Mano_test.3 6.988,39.229 1.96,34.201 1.867,34.201 ; Originalus.2 6.561,48.816 5.418,48.816 1.867,45.265 ; 10.944,21.866 C3.2 ; C3.2@17.548,21.717 21.684,21.717 D2.C@23.461,23.494 ; 1.867,34.201 1.867,45.265
pads on no net: B1.3 B2.5 B2.6 B2.7 B2.8 B3.2 B3.3 B3.4 B3.8 B3.9 B3.10 B3.11 B3.14 B3.30 B3.50 B3.51 B3.52 B3.53 B3.54 B3.55 B3.56 B3.60 B3.61 B3.62 J1.A5 J1.B5

## Polygon pours and split planes (outlines as drawn)
GND on Bottom Layer "GND_L03_P001" (solid, remove dead copper, pour order 1): 105.537,60.889 105.537,0.889 105.41,0.762 -0.508,0.762 -0.508,60.762
GND on Top Layer "GND_L01_P000" (solid, remove dead copper, pour order 0): 103.532,60.892 105.488,58.935 105.488,1.023 -0.557,1.023 -0.43,1.15 -0.43,61.016

## Keep-outs
Keep-Out Layer:
  the board outline again, w0.254

## Silkscreen, mask and mechanical layers (free items; w line width, h text height)
Top Overlay:
  text "Kute Pute" at 60.682,50.522 h5

## Dimensions
102.346,3.257 to 106,0 on Mechanical 1
102.346,43.257 to 106,60 on Mechanical 1
102.346,43.257 to 106,60 on Mechanical 1
102.346,43.257 to 102.346,3.257 on Mechanical 1
102.346,43.257 to 102.346,3.257 on Mechanical 1

## Text inside footprints (layer, text, board x,y; h text height)
L1: Mechanical 13 "*" at 37.338,31.28 h1.27 r270